# EAGLE board Placa do AD8232 (EAGLE 9.6.2)
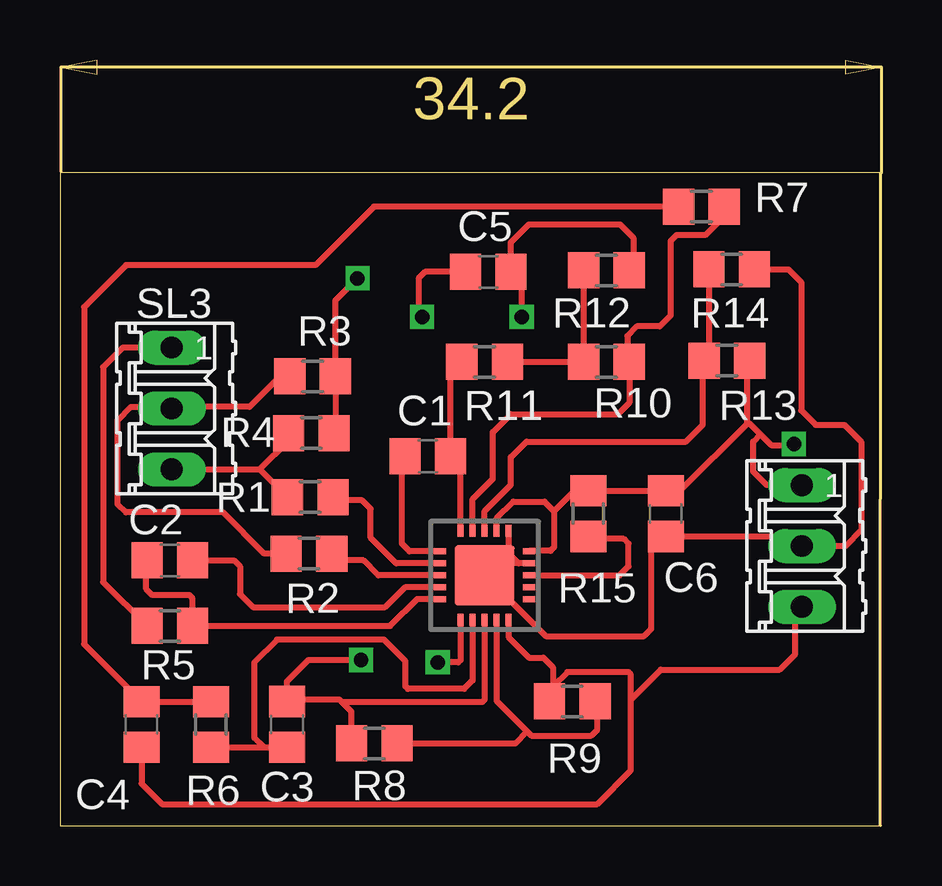
[diagram p0: board, top side]
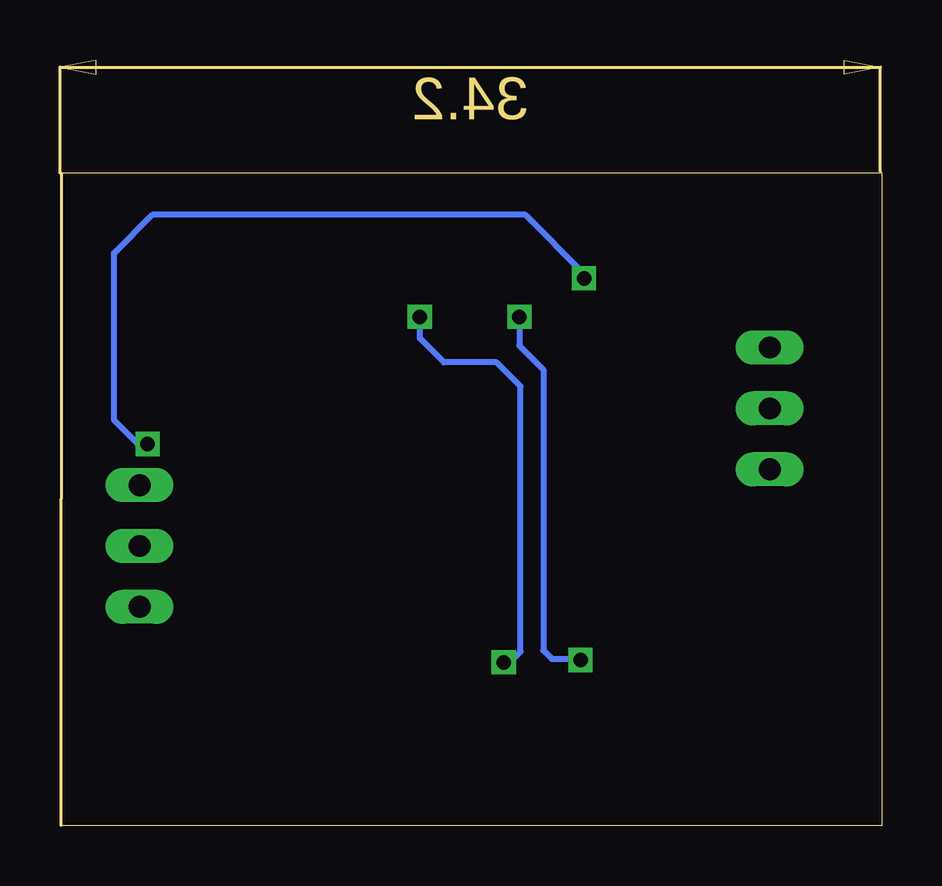
[diagram p1: board, bottom side, seen from below]

Size 34.2 x 27.2 mm. Coordinates in mm from the lower left corner, seen from the top.
Outline: 0,0 34.2,0 34.2,27.2 0,27.2 0,0
Copper layers (1*16): Top 0.035mm / dielectric 1.5mm / Bottom 0.035mm
Design rules "default": minimum track width 10mil, minimum drill 24mil, track to track 8mil, track to pad 8mil, pad to pad 8mil, via to via 8mil, smd to smd 8mil, copper to edge 40mil, drill to drill 8mil, minimum pad ring 10mil, minimum via ring 8mil, stop-mask expansion 4mil, vias tented up to drill 0mil, thermal gap 10mil

## Footprints (pad centres in the part's own frame; a part is rotated, then mirrored left to right if it is on the bottom)
C0805 = smd 1.3 x 1.5: 1 -0.95,0; 2 0.95,0
R0805 = smd 1.3 x 1.5: 1 -0.95,0; 2 0.95,0
03P = drill 0.914 long: 1 -2.54,0; 2 0,0; 3 2.54,0
LFCSP_20 = smd 0.5 x 0.25: 1 -1.85,1; 2 -1.85,0.5; 3 -1.85,0; 4 -1.85,-0.5; 5 -1.85,-1; 11 1.85,-1; 12 1.85,-0.5; 13 1.85,0; 14 1.85,0.5; 15 1.85,1 | smd 0.25 x 0.5: 6 -1,-1.85; 7 -0.5,-1.85; 8 0,-1.85; 9 0.5,-1.85; 10 1,-1.85; 16 1,1.85; 17 0.5,1.85; 18 0,1.85; 19 -0.5,1.85; 20 -1,1.85 | smd 2.5 x 2.5: PAD 0,0

## Placement (x,y rotation side)
C1  [C0805]  15.33,15.39 0 top
C2  [C0805]  4.58,11.05 0 top
C3  [C0805]  9.47,4.22 270 top
C4  [C0805]  3.4,4.21 90 top
C5  [C0805]  17.85,23.07 0 top
C6  [C0805]  25.25,13 270 top
R1  [R0805]  10.43,13.69 0 top
R2  [R0805]  10.38,11.33 0 top
R3  [R0805]  10.53,18.72 0 top
R4  [R0805]  10.48,16.35 0 top
R5  [R0805]  4.58,8.32 180 top
R6  [R0805]  6.3,4.21 90 top
R7  [R0805]  26.74,25.79 0 top
R8  [R0805]  13.1,3.43 0 top
R9  [R0805]  21.36,5.18 180 top
R10  [R0805]  22.78,19.32 0 top
R11  [R0805]  17.7,19.32 180 top
R12  [R0805]  22.78,23.13 180 top
R13  [R0805]  27.8,19.37 0 top
R14  [R0805]  28,23.18 180 top
R15  [R0805]  22.03,13 270 top
SL1  [03P]  30.93,11.65 270 top
SL3  [03P]  4.66,17.38 270 top
U$1  AD8232  [LFCSP_20]  17.7,10.43 0 top

## Library data of the parts
C1-C6 R1-R15 = rcl
SL1 SL3 = con-amp-quick; OC_FARNELL: unknown; OC_NEWARK: unknown
U$1 = AD8232; AVAILABILITY: Not in stock; DESCRIPTION: AD8232 Sensor Signal Conditioner Interface Evaluation Board; MF: Analog Devices; MP: AD8232; PACKAGE: LFCSP-20 Analog Devices; PRICE: None

## Nets
GND: C6.2 R14.1 SL1.2 U$1.14 U$1.16 U$1.PAD
HPOUT: R7.2 R10.2 U$1.19
N$1: C1.1 U$1.1
N$2: C1.2 R11.2 U$1.20
N$3: R1.2 U$1.2
N$4: R2.2 U$1.3
N$5: R1.1 R4.1 SL3.3
N$6: R2.1 R3.1 SL3.2
N$7: C2.2 U$1.4
N$8: C2.1 R5.1 U$1.5
N$9: C3.2 R6.1 U$1.7
N$10: R13.1 R14.2 U$1.18
N$11: R8.2 R9.1 U$1.9
N$13: R10.1 R11.1 R12.2
N$14: C4.2 R6.2 R7.1
N$16: R15.2 U$1.13
OUT: C4.1 R9.2 SL1.3 U$1.10
REFOUT: C3.1 C5.1 R8.1 U$1.8
RLD: R5.2 SL3.1
SW: C5.2 R12.1 U$1.6
VCC: C6.1 R3.2 R4.2 R13.2 R15.1 SL1.1 U$1.15 U$1.17

## Tracks (layer width: path | path; a pad name or v marks a point on that pad's centre or on a via)
GND
  Top 0.254: U$1.16 18.7,11.55 18.6,11.45 | 18.6,11.45 18.5,11.35 18.5,11.23 U$1.PAD | 18.6,11.45 19.12,10.93 U$1.14 18.33,10.93 18.1,10.7 18.1,10.05 20.25,7.9 24.35,7.9 24.65,8.2 24.65,11.45 C6.2 30.53,12.05 SL1.2 32.75,11.65 33.4,12.3 33.4,16 32.7,16.7 31.5,16.7 30.9,17.3 30.9,22.65 30.37,23.18 R14.1
HPOUT
  Top 0.254: U$1.19 17.2,13.6 18.05,14.45 18.05,16.4 18.8,17.15 23.25,17.15 23.75,17.65 23.75,19.3 R10.2 23.65,19.4 23.65,20.4 24.05,20.8 25,20.8 25.45,21.25 25.45,24.35 25.7,24.6 26.9,24.6 27.69,25.39 R7.2
N$1
  Top 0.254: U$1.1 14.57,11.43 14.25,11.75 14.25,15.26 C1.1
N$2
  Top 0.254: U$1.20 16.7,14.97 C1.2 16.28,18.85 R11.2
N$3
  Top 0.254: U$1.2 14.02,10.93 12.95,12 12.95,13.2 12.6,13.55 11.52,13.55 R1.2
N$4
  Top 0.254: U$1.3 13.27,10.43 12.65,11.05 11.61,11.05 R2.2
N$5
  Top 0.254: SL3.3 8.33,14.84 | 8.33,14.84 R1.1 | R4.1 9.53,16.04 8.33,14.84
N$6
  Top 0.254: R2.1 8.52,11.33 6.8,13.05 2.75,13.05 2.4,13.4 2.4,16.9 2.95,17.45 4.59,17.45 SL3.2 4.73,17.45 7.9,17.45 9.17,18.72 R3.1
N$7
  Top 0.254: C2.2 7.25,11.05 7.5,10.8 7.5,9.65 8.05,9.1 13.55,9.1 14.38,9.93 U$1.4
N$8
  Top 0.254: U$1.5 15.83,9.45 14.9,9.45 13.77,8.32 R5.1 5.53,9.47 5.4,9.6 3.85,9.6 3.6,9.85 3.6,11.02 C2.1
N$9
  Top 0.254: R6.1 8.5,3.26 | 8.5,3.26 C3.2 | U$1.7 17.2,6.05 16.85,5.7 14.5,5.7 14.4,5.8 14.4,6.85 13.5,7.75 9.05,7.75 8.1,6.8 8.1,3.66 8.5,3.26
N$10
  Top 0.254: R14.2 27.05,19.57 R13.1 26.8,19.32 26.8,16.7 26.1,16 19.45,16 18.8,15.35 18.8,14.2 17.7,13.1 U$1.18
N$11
  Top 0.254: U$1.9 18.2,5.2 19.48,3.92 | 19.48,3.92 19.65,3.75 22.15,3.75 22.4,4 22.4,5.09 R9.1 | R8.2 18.98,3.43 19.48,3.92
N$13
  Top 0.254: R12.2 R10.1 R11.1
N$14
  Top 0.254: R6.2 C4.2 1,7.56 1,21.6 2.75,23.35 10.65,23.35 13.09,25.79 R7.1
N$16
  Top 0.254: U$1.13 23.33,10.43 23.7,10.8 23.7,11.75 23.5,11.95 22.13,11.95 R15.2
OUT
  Top 0.254: U$1.10 18.7,7.85 19.55,7 20.15,7 20.55,6.6 20.55,5.8 | 20.55,5.8 20.55,5.32 R9.2 | C4.1 3.4,1.75 4.25,0.9 22.4,0.9 23.8,2.3 23.8,5.25 | 23.8,5.25 23.8,6.3 23.7,6.4 21.15,6.4 20.55,5.8 | 23.8,5.25 25.05,6.5 30,6.5 30.65,7.15 30.65,8.83 SL1.3
REFOUT  (via drill 0.6)
  Top 0.254: C5.1 15.22,23.07 14.95,22.8 14.95,21.35 v15.1,21.2 | v12.55,6.9 10.35,6.9 9.45,6 9.45,5.19 C3.1 9.55,5.25 11.65,5.25 11.75,5.15 | R8.1 12.15,4.75 11.75,5.15 | U$1.8 17.7,5.25 17.6,5.15 11.75,5.15
  Bottom 0.254: v15.1,21.2 15.1,20 14.1,19 14.1,7.3 13.75,6.95 12.6,6.95 v12.55,6.9
RLD
  Top 0.254: SL3.1 2.62,19.92 1.8,19.1 1.8,10.15 R5.2
SW  (via drill 0.6)
  Top 0.254: R12.1 23.9,23.3 23.9,24.5 23.35,25.05 19.55,25.05 18.8,24.3 C5.2 19.25,22.62 v19.25,21.2 | U$1.6 16.7,6.9 16.6,6.8 v15.75,6.8
  Bottom 0.254: v15.75,6.8 15.5,6.8 15.05,7.25 15.05,18.3 16.05,19.3 18.25,19.3 19.25,20.3 v19.25,21.2
VCC  (via drill 0.6)
  Top 0.254: 28.65,16.75 28.65,19.27 R13.2 | R4.2 11.48,16.4 R3.2 11.48,21.88 v12.4,22.8 | U$1.17 18.2,12.8 18.9,13.5 20.2,13.5 20.6,13.1 | 20.6,13.1 20.6,11.6 20.45,11.45 19.57,11.45 U$1.15 | 20.6,13.1 21.45,13.95 R15.1 C6.1 25.85,13.95 28.65,16.75 | 28.65,16.75 28.75,16.75 29.2,16.3 | 29.2,16.3 29.65,15.85 30.55,15.85 v30.6,15.9 | SL1.1 29.46,14.19 28.9,14.75 28.9,16 29.2,16.3
  Bottom 0.254: v12.4,22.8 12.4,23 14.85,25.45 30.4,25.45 32,23.85 32,16.9 31,15.9 v30.6,15.9